# EAGLE board hello8 (EAGLE 4.15)
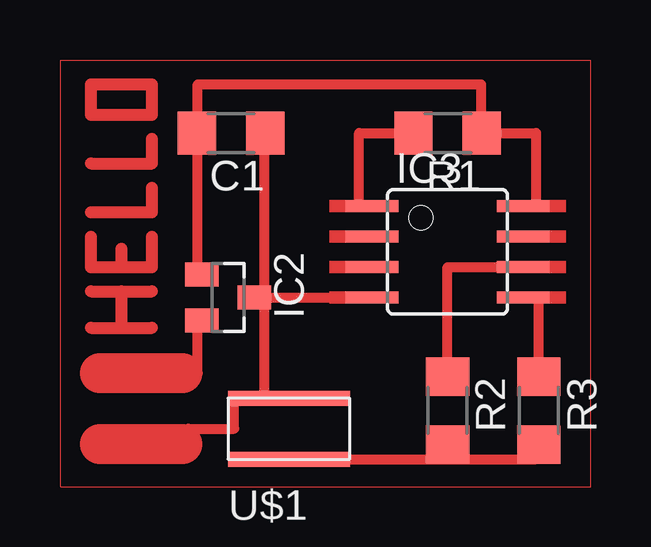
[diagram p0: board, top side]

No outline drawn. Coordinates in mm, seen from the top.
Copper layers (1*16): Top 0.035mm / dielectric 1.5mm / Bottom 0.035mm
Design rules "default": minimum track width 10mil, minimum drill 24mil, track to track 8mil, track to pad 8mil, pad to pad 8mil, via to via 8mil, smd to smd 8mil, copper to edge 40mil, drill to drill 8mil, minimum pad ring 10mil, minimum via ring 8mil, stop-mask expansion 4mil, vias tented up to drill 0mil, thermal gap 10mil

## Footprints (pad centres in the part's own frame; a part is rotated, then mirrored left to right if it is on the bottom)
1206 = smd 1.6 x 1.803: 1 -1.422,0; 2 1.422,0
SOT23 = smd 1 x 1.4: 1 -0.95,-1.1; 2 0.95,-1.1; 3 0,1.1
SOIC8 = smd 0.5 x 2.2: 1 -1.905,-3.154; 2 -0.645,-3.154; 3 0.625,-3.154; 4 1.895,-3.154; 5 1.905,3.154; 6 0.635,3.154; 7 -0.635,3.154; 8 -1.905,3.154
SMT_PINS_2 = smd 5.08 x 0.635: 1 0,0; 2 0,2.54

## Placement (x,y rotation side)
C1  3.3uF  [1206]  7.24,14.75 180 top
IC2  5V  [SOT23]  7.11,7.89 270 top
IC3  [SOIC8]  16.26,9.8 270 top
R1  10k  [1206]  16.26,14.75 180 top
R2  499  [1206]  16.26,3.17 270 top
R3  1k  [1206]  20.07,3.17 270 top
U$1  2_PIN_HEADER  [SMT_PINS_2]  9.65,1.14 0 top

## Library data of the parts
C1 IC2 IC3 R1-R3 U$1 = ng

## Nets
N$1: C1.2 IC2.1 IC3.8 R1.1
N$2: C1.1 IC2.3 IC3.4 U$1.2
N$3: IC2.2
N$4: IC3.6 R2.1
N$5: R2.2 R3.2 U$1.1
N$6: IC3.1 R1.2
N$7: IC3.5 R3.1

## Tracks (layer width: path | path; a pad name or v marks a point on that pad's centre or on a via)
N$1
  Top 0.406: 5.84,14.75 5.84,16.78 17.66,16.78 17.66,14.75 R1.1 19.95,14.75 19.95,11.7 IC3.8 19.31,11.7 | 5.84,14.75 C1.2 | IC2.1 5.84,8.84 5.84,14.75
N$2
  Top 0.406: IC3.4 13.09,7.9 13.09,7.89 8.64,7.89 | 8.64,14.75 8.64,14.88 | 8.64,14.75 C1.1 | 8.64,7.89 8.64,14.75 | 8.64,7.89 IC2.3 | U$1.2 8.64,3.68 | 8.64,3.68 8.64,7.89 | 5.21,1.78 5.46,2.41 7.37,2.41 7.37,3.68 8.64,3.68
  Top 1.676: 1.78,1.78 5.21,1.78
N$4
  Top 0.406: 16.26,4.57 R2.1 16.26,9.16 IC3.6
N$5
  Top 0.406: 20.07,1.78 R3.2 19.95,1.75 19.95,1.14 16.26,1.14 | 16.14,1.75 16.14,1.91 | R2.2 16.14,1.75 | 16.14,1.75 16.14,1.4 | R2.2 16.26,1.91 | U$1.1 16.26,1.14 | R2.2 16.26,1.14
N$6
  Top 0.406: R1.2 12.58,14.75 12.58,11.7 IC3.1 13.22,11.7
N$7
  Top 0.406: R3.1 20.07,7.89 IC3.5 19.31,7.89
N$8
  Top 0.406: 5.84,7 5.84,4.75 5.21,4.75
  Top 1.676: 1.78,4.75 5.21,4.75
N$10
  Top 0: 0.13,0 0.13,17.8 22.23,17.8 22.23,0 0.13,0
N$17
  Top 0.508: 2.67,6.62 3.94,6.62 | 1.4,6.62 2.67,6.62 | 2.67,6.62 2.67,8.14
N$19
  Top 0.508: 1.4,8.14 3.94,8.14
N$20
  Top 0.508: 2.67,9.16 1.4,9.16 1.4,10.43 | 2.67,9.16 3.94,9.16 3.94,10.43 | 2.67,9.16 2.67,9.92
N$21
  Top 0.508: 1.4,11.45 3.94,11.45 3.94,12.46
N$22
  Top 0.508: 1.4,13.48 3.94,13.48 3.94,14.49
N$23
  Top 0.508: 3.94,15.51 3.94,16.78 1.4,16.78 1.4,15.51 3.94,15.51
(copper drawn outside any net)
  shapes: Top area x8